# Altium PCB Screen_PCB.PcbDoc
Units mm, origin at the board's own origin, x right, y up, seen from the top; angles counter-clockwise.
Board outline 15 x 42 mm, 2 copper layers (Top Layer, Bottom Layer), stack 1.536 mm thick; 28 components, 26 nets, 87 pads, 35 vias.
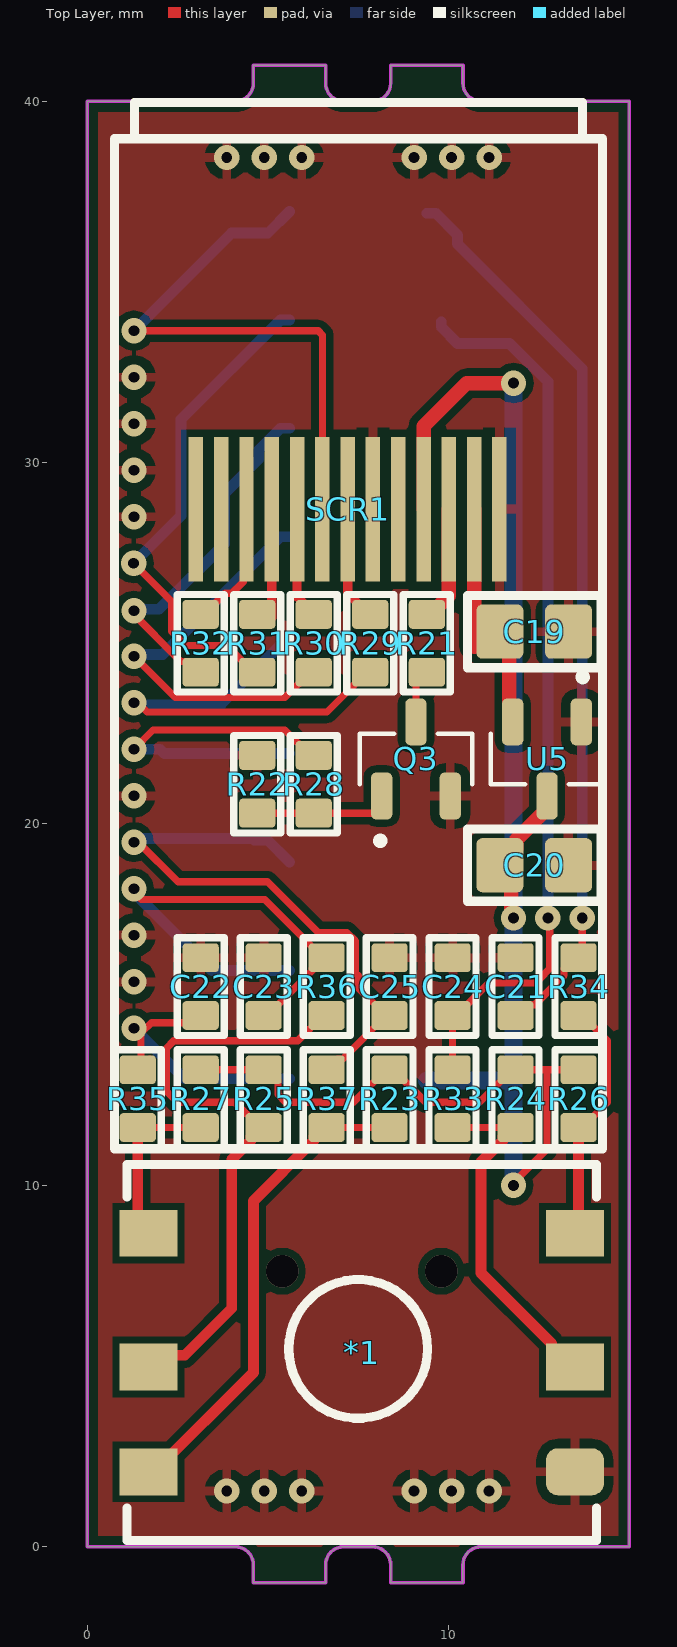
[diagram p0: Top Layer view]
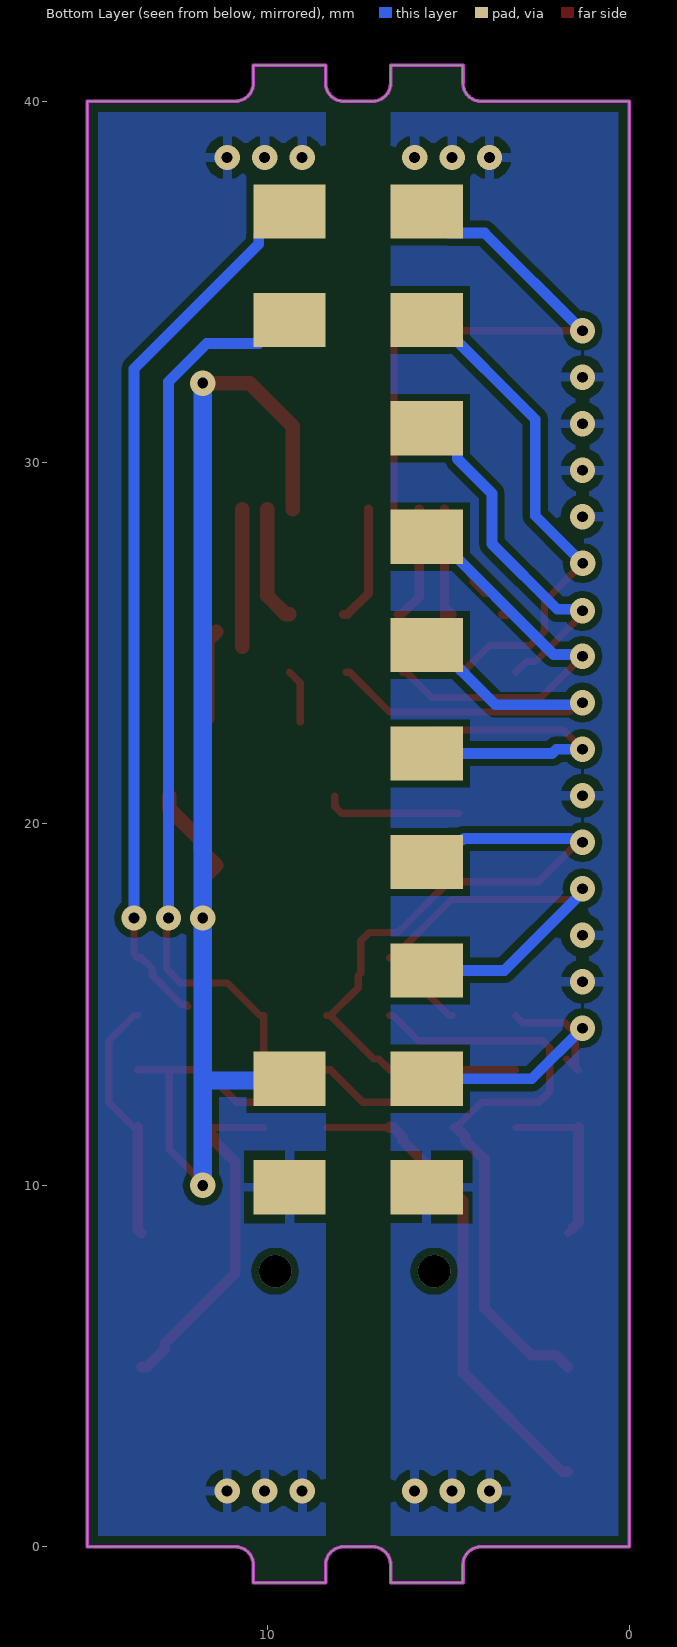
[diagram p1: Bottom Layer view, seen from below]
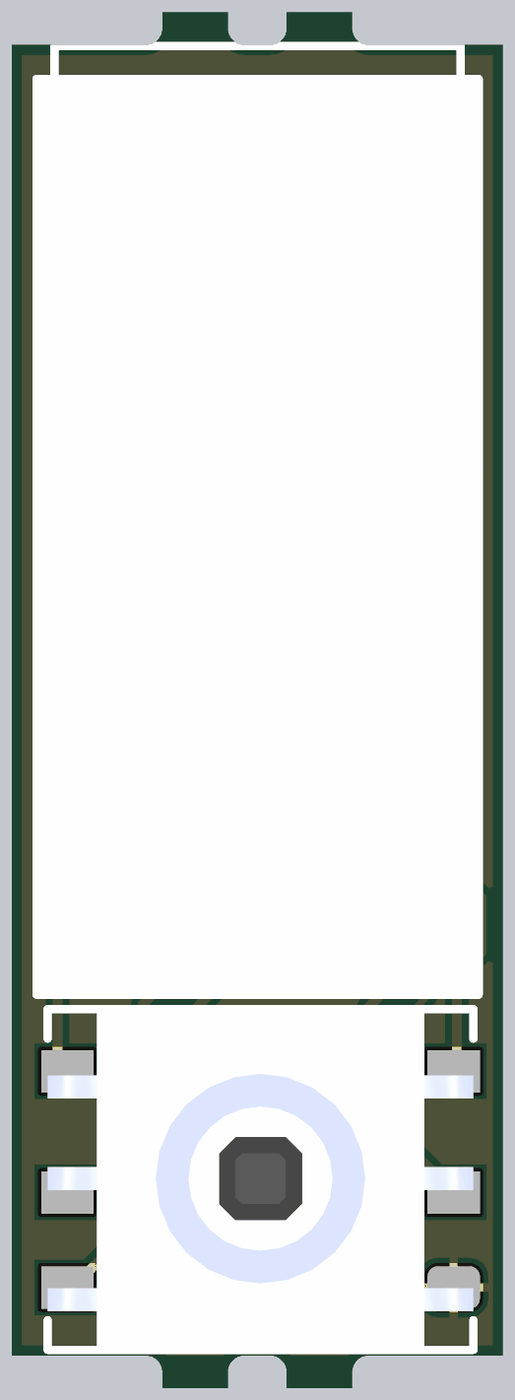
[diagram p2: 3D render of the assembled board from above, using the file's embedded part models]

## Layer stack, top to bottom
Top Solder: solder mask 0.0102, Solder Resist, Dk 3.5
Top Layer: signal copper 0.018
Dielectric 1: dielectric 1.5, FR-4, Dk 4.8
Bottom Layer: signal copper 0.018
Bottom Solder: solder mask 0.0102, Solder Resist, Dk 3.5

## Board outline
4.1,0 cw(c4.1,-0.5) 4.6,-0.5 4.6,-1 6.6,-1 6.6,-0.5 cw(c7.1,-0.5) 7.1,0 7.9,0 cw(c7.9,-0.5) 8.4,-0.5 8.4,-1 10.4,-1 10.4,-0.5 cw(c10.9,-0.5) 10.9,0 15,0 15,40 10.9,40 cw(c10.9,40.5) 10.4,40.5 10.4,41 8.4,41 8.4,40.5 cw(c7.9,40.5) 7.9,40 7.1,40 cw(c7.1,40.5) 6.6,40.5 6.6,41 4.6,41 4.6,40.5 cw(c4.1,40.5) 4.1,40 0,40 0,0

## Design rules (kind name [scope] priority, off if disabled: settings)
BoardOutlineClearance [All] p1: gap=0.3 ignorepadtopadclearanceinfootprint=FALSE except(0: Arc-SplitContinuation Track-SplitContinuation SMDPad-SplitContinuation THPad-SplitContinuation Via-SplitContinuation Fill-SplitContinuation Poly-SplitContinuation Region-SplitContinuation Text-SplitContinuation)
Clearance [All] p1: gap=0.2 ignorepadtopadclearanceinfootprint=FALSE except(0: Arc-Hole Track-Hole SMDPad-Hole THPad-Hole Via-Hole Fill-Hole Poly-Hole Region-Hole Text-Hole; 0.254: Text-Text)
PolygonConnect [All] p1: connectstyle=Relief reliefconductorwidth=0.254 reliefentries=4 polygonreliefangle="90 Angle" airgapwidth=0.254
RoomDefinition Screen_PCB [InComponentClass('Screen_PCB')] p1: confinementstyle=ConfineIn formatcopy=TRUE lockcomponents=FALSE outline 15,0 15,40.8 0,40.8 0,0
RoutingVias [All] p1: holewidth=0.3 width=0.7 viastyle="Through Hole" minholewidth=0.3 minwidth=0.7 maxholewidth=1 maxwidth=2
SolderMaskExpansion [All] p1: expansion=0.102 istentingtop=FALSE
Width [All] p1: maxlimit=2 minlimit=0.2 preferedwidth=0.3
30 further rules are at their usual default settings.

## Components (designator, comment, footprint, x,y, rotation, side; value= is the part's Value field where it differs from the comment)
*1 "KLS7-MT-05-9.0" KLS7-MT-05-9.0 13.5,2.075 r180 top locked
C19 "1uF" C0805 12.373,25.323 r180 top
C20 "1uF" C0805 12.373,18.86 r180 top
C21 "0.1uF" R0603 11.857,15.5 r270 top
C22 "0.1uF" R0603 3.143,15.5 r90 top
C23 "0.1uF" R0603 4.886,15.5 r90 top
C24 "0.1uF" R0603 10.114,15.5 r270 top
C25 "0.1uF" R0603 8.371,15.5 r90 top
Q3 "IRLML6244" SOT95P237X112-3N 9.1,21.8 r90 top
R21 "33" R0603 9.4,25 r270 top
R22 "100K" R0603 4.707,21.1 r270 top
R23 "10K" R0603 8.371,12.4 r270 top
R24 "10K" R0603 11.857,12.4 r270 top
R25 "10K" R0603 4.886,12.4 r270 top
R26 "10K" R0603 13.6,12.4 r270 top
R27 "10K" R0603 3.143,12.4 r270 top
R28 "1K" R0603 6.271,21.1 r90 top
R29 "33" R0603 7.836,25 r270 top
R30 "33" R0603 6.271,25 r270 top
R31 "33" R0603 4.707,25 r270 top
R32 "33" R0603 3.143,25 r270 top
R33 "470" R0603 10.114,12.4 r90 top
R34 "470" R0603 13.6,15.5 r90 top
R35 "470" R0603 1.4,12.4 r90 top
R36 "470" R0603 6.629,15.5 r90 top
R37 "470" R0603 6.629,12.4 r90 top
SCR1 "0.96INCH_TFT" 0.96INCH_TFT 3.01,28.715 r270 top locked
U5 "XC6206P282MR" SOT95P237X112-3N 12.726,21.8 r270 top

## Footprints (in the part's own frame and the unit in brackets; to place one, negate y for a bottom-side part, rotate by r counter-clockwise, add the part's x,y. Pads: shape width x height; smd on the part's side, far side on the other; paste and mask are expansions set on the pad)
0.96INCH_TFT [mm]
  rect 4x0.4 smd: 1(0,0) 2(0,0.7) 3(0,1.4) 4(0,2.1) 5(0,2.8) 6(0,3.5) 7(0,4.2) 8(0,4.9) 9(0,5.6) 10(0,6.3) 11(0,7) 12(0,7.7) 13(0,8.4)
  silkscreen extent -11.25,-2.25 17.7,11.25, body extent -10.2,-2.25 17.75,11.25, height 3.5
C0805 [mm]
  rrect25% 1.3x1.5 smd: 1(-0.95,0) 2(0.95,0)
  silkscreen extent -1.85,-1 1.85,1, body extent -1.1,-0.65 1.05,0.65, height 1.15
KLS7-MT-05-9.0 [mm]
  rrect50% 1.6x1.3 smd: 1(0,0)
  rect 1.6x1.3 smd: 2(0,-2.9) 3(0,-6.6) 4(11.8,-6.6) 5(11.8,-2.9) 6(11.8,0)
  silkscreen extent -0.6,-8.5 12.4,1.9, body extent -0.6,-8.52 12.4,1.87, height 9.2
R0603 [mm]
  rrect25% 0.8x1 smd: 1(-0.8,0) 2(0.8,0)
  silkscreen extent -1.35,-0.65 1.35,0.65, body extent -0.8,-0.35 0.8,0.45, height 0.5
SOT95P237X112-3N [mm]
  rrect50% 1.3x0.59 smd: 1(-1.025,0.95) 2(-1.025,-0.95) 3(1.025,0)
  silkscreen extent -2.37,-1.56 0.7,1.56, body extent -1.05,-1 1.05,1, height 1.1

## Part data
C19 C20 C21 C22 C23 C24 C25: library part CAP
Q3: "MOSFET P-CH 30V 3.6A SOT-23-3", Package=None, Availability=Unavailable, MF="{'manufacturer': u'Infineon Technologies'}", MP=IRLML9301TRPBF, Price=None
R21 R22 R23 R24 R25 R26 R27 R28 R29 R30 R31 R32 R33 R34 R35 R36 R37: library part "RES SMD UNI", "Resistor SMD", Category=Resistors
SCR1: "LH096T-IG01 TFT RGB 0,96\" screen"
U5: "Adjustable Precision Shunt Regulator, 34 ppm / degC, 200 mA, -40 to 85 degC, 3-pin SOT-23 (DBZ), Green (RoHS & no Sb/Br)", Manufacturer=UTD, Rating=Military, Temp Coeff(Max)(ppm/ degree C)=92, Temp Coeff(Typ)(ppm/ degree C)=34, Code_JEDEC=TO-236, ComponentLink1Description="Manufacturer URL", ComponentLink1URL=http://www.ti.com/, ComponentLink2Description=Datasheet, ComponentLink2URL=http://www.ti.com/general/docs/lit/getliterature.tsp?genericPartNumber=TL431&fileType=pdf, ComponentLink3Description="Package Specification", ComponentLink3URL=http://www.ti.com/litv/pdf/mpds108a, DatasheetVersion=SLVS543M, Eco-Plan="Green (RoHS & no Sb/Br)", Initial Accuracy @ 25/deg C(%)=2, Iout/Iz(Max)(mA)=100, Min Iz for Regulation(uA)=600, Mounting Technology="Surface Mount", PackageDescription="3-Pin Plastic Small Outline, Body 2.92 x 1.3 mm, Pitch 0.95 mm", PackageReference=DBZ0003A, PackageVersion=4203227/B, PartNumber=XC6206P282MR, SubFamily="Shunt Voltage Reference", VO Adj(Max)(V)=36, VO Adj(Min)(V)=2.495

## Free pads (board coordinates)
  rect 2x1.5 smd far side: ""(5.6,9.95) ""(5.6,12.95) ""(5.6,15.95) ""(5.6,18.95) ""(5.6,21.95) ""(5.6,24.95) ""(5.6,27.95) ""(5.6,30.95) ""(5.6,33.95) ""(5.6,36.95) ""(9.4,9.95) ""(9.4,12.95) ""(9.4,33.95) ""(9.4,36.95)

## Via types
v1: diameter 0.7, hole 0.3, Top Layer to Bottom Layer, 33 vias
v2: diameter 0.9, hole 0.9, Top Layer to Bottom Layer, 2 vias

## Nets (pads, with @x,y where several pads share a name; then routed paths per layer and width w, separated by ;. In a path a pad name is that pad's centre, name@x,y a point inside that pad or via, vN(x,y) a via of type N, cw(c..) or ccw(c..) an arc to the next point about the centre after c; other vN are vias at no path point)
"3.3V MB": C20.2 pad.@9.4,12.95 R23.1 R24.1 R25.1 R26.1 R27.1 SCR1.10 U5.3 | length 49.8
  Top Layer w0.2: R27.1 R25.1 4.986,13.2 5.286,12.9 5.286,12.514 5.5,12.3 7.371,12.3 8.271,13.2 R23.1 8.471,13.2 9.371,12.3 10.857,12.3 11.757,13.2 R24.1 12.729,13.2 ; v1(11.8,10) 11.8,10.071 12.729,11 12.729,13.2 ; R26.1 12.729,13.2
  Top Layer w0.4: SCR1.10 9.31,31.01 10.5,32.2 v1(11.8,32.2) ; v1(11.8,17.4) 11.743,17.457 11.743,18.426 11.8,18.483 C20.2 11.873,19.31 11.873,19.567 12.726,20.42 U5.3
  Bottom Layer w0.5: pad.@9.4,12.9 11.7,12.9 11.8,13 ; v1(11.8,10) 11.8,13 ; v1(11.8,32.2) v1(11.8,17.4) 11.8,13
GND: *1.1 C19.1 C20.1 C21.1 C22.2 C23.2 C24.1 C25.2 pad.@5.6,9.95 pad.@9.4,9.95 Q3.2 R22.1 SCR1.8 SCR1.13 U5.1
  other v1: 3.863,1.544 4.9,1.544 5.938,1.544 9.05,1.544 10.088,1.544 11.125,1.544 1.294,15.637 1.294,16.923 1.294,20.783 1.294,28.503 1.294,29.79 1.294,31.077 1.294,32.363 3.863,38.444 4.9,38.444 5.938,38.444 9.05,38.444 10.088,38.444 11.125,38.444
"JOYSTICK C": C25.1 pad.@5.6,18.95 R37.2 | length 16.7
  Top Layer w0.2: v1(1.294,19.497) 1.415,19.497 2.512,18.4 4.994,18.4 6.394,17 7.194,17 7.429,16.766 7.429,15.871 7.5,15.8 7.5,15.471 C25.1@8.271,14.7 ; R37.2 6.929,13.5 7.071,13.5 C25.1@8.271,14.7 ; C25.1 C25.1@8.271,14.7
  Bottom Layer w0.3: v1@1.281,19.6 1.308,19.573 1.479,19.573 1.506,19.6 4.574,19.6 4.624,19.55 5,19.55 pad.@5.6,18.95
"JOYSTICK D": C23.1 pad.@5.6,15.95 R36.2 | length 13.1
  Top Layer w0.2: 1.494,17.912 4.916,17.912 R36.2@6.529,16.3 ; C23.1 4.986,14.7 6.229,15.943 6.229,16 R36.2@6.529,16.3 ; R36.2 R36.2@6.529,16.3
  Bottom Layer w0.3: 1.494,17.912 3.457,15.95 pad.@5.6,15.95
  other v1: 1.294,18.21
"JOYSTICK L": C24.2 pad.@9.4,33.95 R33.2 | length 24.7
  Top Layer w0.2: R33.2 C24.2 10.214,14.7 11.114,15.6 12.423,15.6 12.657,15.834 12.657,15.857 12.8,16 v1@12.8,17.4
  Bottom Layer w0.3: pad.@9.8,33.9 9.8,33.75 10.25,33.3 11.69,33.3 12.75,32.24 v1(12.75,17.4)
"JOYSTICK R": C21.2 pad.@9.4,36.95 R34.2 | length 24.6
  Top Layer w0.2: C21.2@12.207,14.95 12.257,15 12.389,15 13.2,15.811 13.2,16 13.5,16.3 R34.2 13.7,16.4 v1(13.7,17.4)
  Bottom Layer w0.3: pad.@9.4,36.9 9.65,36.9 10.25,36.3 10.25,36.05 13.7,32.6 v1(13.7,17.4)
"JOYSTICK U": C22.1 pad.@5.6,12.95 R35.2 | length 8.3
  Top Layer w0.2: R35.2@1.734,13.5 1.434,13.2 R35.2 1.494,13.294 1.494,14.256 1.535,14.256 1.78,14.5 2.943,14.5 C22.1
  Bottom Layer w0.3: v1(1.294,14.35) 2.694,12.95 pad.@5.6,12.95
Net*1_2: *1.2 R24.2 R33.1 | length 9.9
  Top Layer w0.2: R33.1 R24.2@11.757,11.6
  Top Layer w0.3: R24.2 11.757,11.6 11.507,11.35 11.507,11.25 10.9,10.643 10.9,7.575 12.85,5.625 12.85,5.475 13.35,4.975 *1.2
Net*1_3: *1.3 R26.2 R34.1 | length 6.8
  Top Layer w0.2: R26.2 13.7,11.6 14.4,12.3 14.4,14 13.7,14.7 R34.1
  Top Layer w0.3: *1.3 13.6,8.775 R26.2
Net*1_4: *1.4 R27.2 R35.1 | length 4.8
  Top Layer w0.2: R35.1 R27.2 ; *1.4@1.55,8.825 *1.4
  Top Layer w0.3: R35.1 1.4,8.975 *1.4@1.55,8.825
Net*1_5: *1.5 R25.2 R36.1 | length 17.4
  Top Layer w0.2: R25.2 4.786,11.6 4.086,12.3 2.5,12.3 2.2,12.6 2.2,13.8 2.4,14 5.829,14 6.529,14.7 R36.1
  Top Layer w0.3: *1.5 2.025,5.3 2.7,5.3 4,6.6 4,10.714 4.536,11.25 4.536,11.35 R25.2@4.786,11.6
Net*1_6: *1.6 R23.2 R37.1 | length 13.5
  Top Layer w0.2: R37.1 R23.2
  Top Layer w0.3: *1.6 1.85,2.075 4.6,4.825 4.6,9.571 6.279,11.25 6.279,11.35 6.529,11.6 R37.1
NetC19_2: C19.2 SCR1.12 U5.2 | length 6.4
  Top Layer w0.4: 10.71,24.91 SCR1.12 ; C19.2 11.681,25.064 11.681,22.92 U5.2
NetQ3_1: Q3.1 R22.2 R28.1 | length 3.8
  Top Layer w0.2: R22.2 R28.1 7.959,20.3 8.15,20.491 Q3.1
NetQ3_3: Q3.3 R21.2 | length 1.5
  Top Layer w0.2: Q3.3 9.1,23.9 R21.2
NetR21_1: R21.1 SCR1.11 | length 3.2
  Top Layer w0.4: R21.1 9.5,25.8 10.01,26.31 SCR1.11
NetR29_1: R29.1 SCR1.7 | length 3.3
  Top Layer w0.254: SCR1.7 7.21,26.39 7.8,25.8 R29.1@7.9,25.8
NetR30_1: R30.1 SCR1.5 | length 3.2
  Top Layer w0.254: SCR1.5 5.81,26.29 6.3,25.8 R30.1@6.4,25.8
NetR31_1: R31.1 SCR1.4 | length 3.3
  Top Layer w0.254: R31.1@4.9,25.8 R31.1@5.11,26.01 ; R31.1@5.11,25.71 SCR1.4
NetR32_1: R32.1 SCR1.3 | length 1.9
  Top Layer w0.2: R32.1 3.243,25.8 3.826,26.383 4.002,26.383 4.319,26.7 4.319,26.824 SCR1.3@4.41,26.915
  Top Layer w0.254: R32.1@3.4,25.8 R32.1@3.5,25.8
"SCREEN CS": pad.@5.6,24.95 R29.2 | length 12.1
  Top Layer w0.2: v1(1.294,23.357) 1.405,23.357 1.662,23.1 6.636,23.1 7.736,24.2 R29.2
  Bottom Layer w0.3: v1(1.294,23.357) 1.351,23.3 3.7,23.3 5.35,24.95 pad.@5.6,24.95
"SCREEN LED": pad.@5.6,21.95 R28.2 | length 9.8
  Top Layer w0.2: v1(1.294,22.07) 1.825,22.6 5.471,22.6 6.171,21.9 R28.2
  Bottom Layer w0.3: v1(1.294,22.07) 2.018,22.07 2.138,21.95 pad.@5.6,21.95
"SCREEN RS": pad.@5.6,27.95 R30.2 | length 11.4
  Top Layer w0.2: v1(1.294,24.643) 2.003,23.935 2.438,23.5 5.471,23.5 6.171,24.2 R30.2
  Bottom Layer w0.3: v1(1.294,24.643) 1.346,24.694 2.094,24.694 5.35,27.95 pad.@5.6,27.95
"SCREEN RST": pad.@5.6,36.95 SCR1.6 | length 15.7
  Top Layer w0.2: v1@1.386,33.65 6.393,33.65 6.51,33.533 SCR1.6
  Bottom Layer w0.3: v1(1.294,33.65) 3.995,36.35 5,36.35 pad.@5.6,36.95
"SCREEN SCL": pad.@5.6,33.95 R31.2 | length 13.8
  Top Layer w0.2: v1(1.287,27.217) 2.343,26.16 2.343,25.334 2.577,25.1 2.736,24.941 3.866,24.941 4.607,24.2 R31.2
  Bottom Layer w0.3: v1(1.287,27.217) 2.6,28.53 2.6,31.2 5.35,33.95 pad.@5.6,33.95
"SCREEN SDA": pad.@5.6,30.95 R32.2 | length 10.1
  Top Layer w0.2: v1@1.192,25.9 2.592,24.5 2.843,24.5 R32.2
  Bottom Layer w0.3: v1@1.192,25.9 1.234,25.942 1.992,25.942 3.8,27.75 3.8,29.15 4.75,30.1 4.75,30.35 5.35,30.95 pad.@5.6,30.95
  other v1: 1.294,25.9
pads on no net: SCR1.1 SCR1.2 SCR1.9
copper on no net:
  other v2: 5.4,7.625 9.8,7.625

## Polygon pours and split planes (outlines as drawn)
GND on Bottom Layer "GND_L02_P001" (solid, remove dead copper, pour order 1): 0,0 6.6,0 6.6,40 0,40
GND on Bottom Layer "GND_L02_P002" (solid, remove dead copper, pour order 2): 8.4,0 15,0 15,40 8.4,40
GND on Top Layer "GND_L01_P000" (solid, remove dead copper, pour order 0): 0,0 15,0 15,40 0,40

## Keep-outs
Keep-Out Layer:
  lines w0.1: 4.1,40 ccw(c4.1,40.5) 4.6,40.5 ; 4.1,40 0,40 0,0 4.1,0 cw(c4.1,-0.5) 4.6,-0.5 ; 4.1,40 4.1,40 ; 4.6,-0.5 4.6,-1 6.6,-1 6.6,-0.5 ; 4.6,-0.5 4.6,-0.5 ; 4.6,40.5 4.6,40.5 ; 4.6,40.5 4.6,41 6.6,41 6.6,40.5 ; 6.6,-0.5 cw(c7.1,-0.5) 7.1,0 ; 6.6,-0.5 6.6,-0.5 ; 6.6,40.5 ccw(c7.1,40.5) 7.1,40 ; 6.6,40.5 6.6,40.5 ; 7.1,0 7.9,0 ; 7.1,0 7.1,0 ; 7.1,40 7.1,40 ; 7.1,40 7.9,40 ; 7.9,0 cw(c7.9,-0.5) 8.4,-0.5 ; 7.9,0 7.9,0 ; 7.9,40 ccw(c7.9,40.5) 8.4,40.5 ; 7.9,40 7.9,40 ; 8.4,-0.5 8.4,-1 10.4,-1 10.4,-0.5 ; 8.4,-0.5 8.4,-0.5 ; 8.4,40.5 8.4,40.5 ; 8.4,40.5 8.4,41 10.4,41 10.4,40.5 ; 10.4,-0.5 cw(c10.9,-0.5) 10.9,0 ; 10.4,-0.5 10.4,-0.5 ; 10.4,40.5 ccw(c10.9,40.5) 10.9,40 ; 10.4,40.5 10.4,40.5 ; 10.9,0 15,0 15,40 10.9,40 ; 10.9,0 10.9,0 ; 10.9,40 10.9,40